# Altium PCB PCB-15_19.PcbDoc (part 2 of 4)
Units mm, origin at the board's own origin, x right, y up, seen from the top; angles counter-clockwise.
Board outline 190 x 150 mm, 6 copper layers (Top Layer, Mid-Layer 1, VCC3V3, GND, Mid-Layer 2, Bottom Layer), stack 1.173 mm thick; 129 components, 396 nets, 1206 pads, 565 vias.
Unrouted connection lines stored in the file: 15.
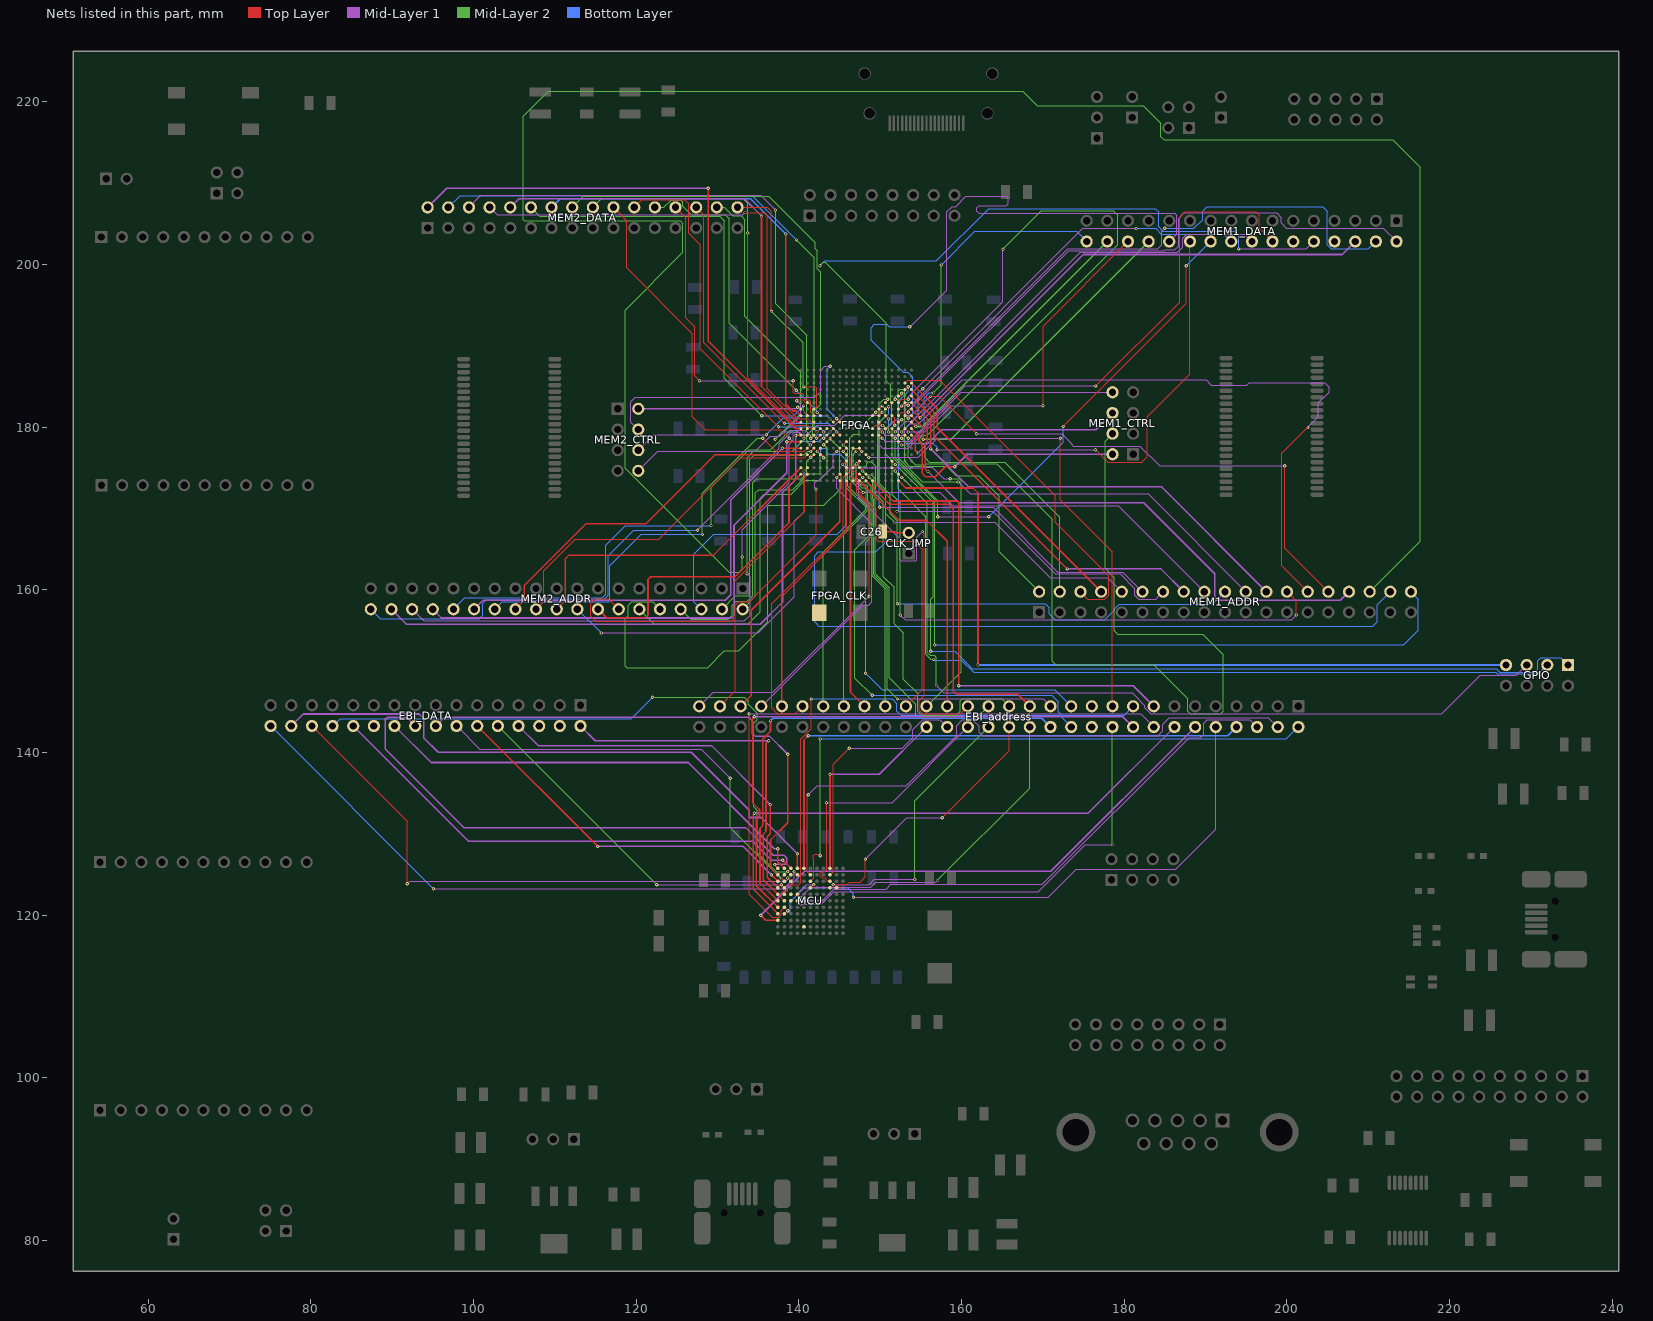
[diagram p6: the nets of this part, all layers, seen from the top]

## Via types
v1: diameter 0.4, hole 0.2, Top Layer to Bottom Layer, 548 vias
v2: diameter 0.4, hole 0.25, Top Layer to Bottom Layer, tented top, 9 vias
v3: diameter 7, hole 5, Top Layer to Bottom Layer, 4 vias
v4: diameter 1.3, hole 0.9, Top Layer to Bottom Layer, 3 vias
v5: diameter 1.5, hole 1.1, Top Layer to Bottom Layer, 1 vias

## Nets (pads, with @x,y where several pads share a name; then routed paths per layer and width w, separated by ;. In a path a pad name is that pad's centre, name@x,y a point inside that pad or via, vN(x,y) a via of type N, cw(c..) or ccw(c..) an arc to the next point about the centre after c; other vN are vias at no path point) (continued)
A11: EBI_address.38 MCU.A9 | length 25.8
  Top Layer w0.2: MCU.A9@143.829,125.754 v1(143.829,137.312)
  Mid-Layer 1 w0.2: v1(143.829,137.312) 149.885,137.312 EBI_address.38@155.702,143.129
A12: EBI_address.36 MCU.B9 | length 31
  Top Layer w0.1: MCU.B9@143.829,124.954 144.221,125.346 144.221,138.532 v1(146.202,140.513)
  Mid-Layer 1 w0.1: v1(146.202,140.513) 152.732,140.513 154.001,141.782 154.001,142.8 155.245,144.043 157.328,144.043 EBI_address.36@158.242,143.129
A13: EBI_address.34 MCU.C9 | length 32.2
  Top Layer w0.1: v1(143.408,133.807) 143.408,125.603 143.154,125.349 142.85,125.349 142.646,125.146 142.646,124.765 142.85,124.562 143.173,124.562 143.581,124.154 MCU.C9@143.829,124.154
  Mid-Layer 1 w0.1: v1(143.408,133.807) 151.46,133.807 EBI_address.34@160.782,143.129
A14: EBI_address.32 MCU.D9 | length 33.4
  Top Layer w0.1: MCU.D9@143.829,123.354 v1(144.224,123.749)
  Mid-Layer 1 w0.1: v1(144.224,123.749) 148.641,123.749 149.276,124.384 v1(154.254,124.384)
  Mid-Layer 2 w0.1: v1(154.254,124.384) 154.254,134.061 EBI_address.32@163.322,143.129
A15: EBI_address.30 MCU.D10 | length 32.5
  Top Layer w0.1: MCU.D10@144.629,123.354 144.948,123.673 144.948,123.774 145.974,123.774 146.253,124.054 147.523,124.054 148.184,124.714 v1(148.184,126.873) ; v1(157.632,131.978) 165.862,140.208 EBI_address.30@165.862,143.129
  Mid-Layer 1 w0.1: v1(148.184,126.873) 153.289,131.978 v1(157.632,131.978)
A16: EBI_address.28 MCU.E4 | length 41.8
  Top Layer w0.1: MCU.E4@139.829,122.554 v1(140.233,122.149)
  Mid-Layer 1 w0.1: v1(140.233,122.149) 141.484,123.399 148.824,123.399 149.454,124.028 156.82,124.028 v1(157.048,124.257)
  Mid-Layer 2 w0.1: v1(157.048,124.257) 168.402,135.611 EBI_address.28@168.402,143.129
A17: EBI_address.26 MCU.F1 | length 58.6
  Top Layer w0.2: v1(136.525,143.878) 136.525,142.588 135.565,141.629 135.565,131.024 135.23,130.688 135.23,123.953 MCU.F1@137.429,121.754
  Bottom Layer w0.2: v1(136.525,143.878) 136.843,144.196 169.875,144.196 EBI_address.26@170.942,143.129
A18: EBI_address.24 MCU.F2 | length 61.4
  Top Layer w0.1: MCU.F2@138.229,121.754 137.846,122.137 137.846,122.733 138.074,122.961 138.575,122.961 138.608,122.994 138.608,123.546 138.811,123.749 140.005,123.749 140.208,123.952 140.208,141.602 141.529,142.923 v1(141.529,146.583)
  Bottom Layer w0.1: v1(141.529,146.583) 151.486,146.583 152.07,145.999 152.07,145.085 152.603,144.551 172.06,144.551 EBI_address.24@173.482,143.129
A19: EBI_address.22 MCU.F3
A20: EBI_address.20 MCU.F4 | length 56.4
  Top Layer w0.1: MCU.F4@139.829,121.754 v1(140.222,121.361)
  Mid-Layer 1 w0.1: v1(140.222,121.361) 142.748,121.361 144.272,122.885 169.443,122.885 175.235,128.676 v1(178.562,128.676)
  Mid-Layer 2 w0.1: v1(178.562,128.676) EBI_address.20@178.562,143.129
A21: EBI_address.18 MCU.G1 | length 72.2
  Top Layer w0.2: v1(134.518,144.399) 134.315,144.196 134.315,133.845 135.165,132.994 135.165,132.222 134.779,131.835 134.779,123.604 MCU.G1@137.429,120.954
  Mid-Layer 1 w0.2: v1(134.518,144.399) 179.832,144.399 EBI_address.18@181.102,143.129
A22: EBI_address.16 MCU.G2 | length 78.9
  Top Layer w0.1: v1(133.883,144.755) 133.883,122.58 136.703,119.761 137.566,119.761 137.82,120.015 137.82,120.545 MCU.G2@138.229,120.954
  Mid-Layer 1 w0.1: v1(133.883,144.755) 182.016,144.755 EBI_address.16@183.642,143.129
A23: EBI_address.14 MCU.H1 | length 69.7
  Top Layer w0.2: v1(134.547,132.509) 134.379,132.34 134.379,123.204 MCU.H1@137.429,120.154
  Mid-Layer 1 w0.2: v1(134.547,132.509) 175.562,132.509 EBI_address.14@186.182,143.129
A24: EBI_address.12 MCU.J1 | length 65.4
  Top Layer w0.2: v1(135.312,119.993) 135.951,119.354 MCU.J1@137.429,119.354
  Mid-Layer 1 w0.2: v1(135.312,119.993) 140.693,125.374 170.967,125.374 EBI_address.12@188.722,143.129
A25: EBI_address.10 MCU.H2 | length 72.2
  Top Layer w0.1: MCU.H2@138.229,120.154 138.229,120.32 138.405,120.32 v1(138.633,120.548)
  Mid-Layer 1 w0.1: v1(146.71,122.199) 170.663,122.199 174.117,125.654 186.36,125.654 191.262,130.556 EBI_address.10@191.262,143.129
  Bottom Layer w0.1: v1(138.633,120.548) 138.633,120.396 138.938,120.396 138.938,121.641 140.64,123.342 145.999,123.342 146.71,122.631 v1(146.71,122.199)
BACKUP.GPIO0: FPGA.R15 GPIO.1 | length 106.7
  Top Layer w0.1: FPGA.R15@151.447,175.807 v1(151.842,175.412)
  Mid-Layer 2 w0.1: v1(151.842,175.412) 156.513,170.741 156.513,159.155 156.21,158.852 v1(156.21,152.425)
  Bottom Layer w0.1: v1(156.21,152.425) 159.182,152.425 161.341,150.266 225.744,150.266 226.162,149.849 230.429,149.849 230.835,150.255 230.835,151.257 231.242,151.663 233.655,151.663 GPIO.1@234.569,150.749
BACKUP.GPIO1: FPGA.T15 GPIO.3 | length 102.5
  Top Layer w0.1: FPGA.T15@151.447,175.007 151.841,174.613 v1(151.841,174.6)
  Mid-Layer 2 w0.1: v1(151.841,174.6) 152.222,174.219 152.222,172.39 155.613,168.999 155.613,152.066 156.244,151.435 v1(156.566,151.435)
  Bottom Layer w0.1: v1(156.566,151.435) 156.642,151.359 159.961,151.359 161.485,149.835 225.663,149.835 225.849,149.649 230.929,149.649 GPIO.3@232.029,150.749
BACKUP.GPIO2: FPGA.U16 GPIO.5 | length 104.9
  Top Layer w0.1: FPGA.U16@152.247,174.207 152.642,173.812 v1(152.654,173.812)
  Mid-Layer 1 w0.1: v1(156.921,148.234) 157.836,147.32 180.975,147.32 182.526,145.769 182.526,145.491 183.262,144.755 219.075,144.755 223.799,149.479 228.219,149.479 GPIO.5@229.489,150.749
  Mid-Layer 2 w0.1: v1(152.654,173.812) 155.813,170.653 155.813,152.275 156.165,151.923 156.667,151.923 156.921,151.669 v1(156.921,148.234)
BACKUP.GPIO3: FPGA.V16 GPIO.7 | length 96.5
  Top Layer w0.2: FPGA.V16@152.247,173.407 153.137,172.517 161.411,172.517 162.027,171.901 v1(162.027,150.749)
  Bottom Layer w0.2: v1(162.027,150.749) GPIO.7@226.949,150.749
CLK: C26.2 CLK_JMP.2 | length 3.3
  Top Layer w0.2: C26.2@150.321,167.148 151.841,167.148 151.99,166.999 CLK_JMP.2@153.524,166.999
CS0: EBI_address.6 MCU.D6 | length 70.7
  Top Layer w0.1: MCU.D6@141.429,123.354 141.824,123.749 v1(141.834,123.749)
  Mid-Layer 1 w0.1: v1(141.834,123.749) 140.917,123.749 139.878,122.709 139.878,121.895 140.005,121.768 142.872,121.768 144.303,123.199 150.732,123.199 151.308,123.774 169.926,123.774 187.985,141.834 189.357,141.834 189.763,142.24 189.763,143.612 190.195,144.043 195.428,144.043 EBI_address.6@196.342,143.129
CS1: EBI_address.8 MCU.A5 | length 69.6
  Top Layer w0.2: MCU.A5@140.629,125.754 140.629,141.518 v1(141.173,142.062)
  Bottom Layer w0.2: v1(141.173,142.062) 192.735,142.062 EBI_address.8@193.802,143.129
DATA0: EBI_DATA.32 MCU.B4 | length 74.6
  Top Layer w0.1: v1(139.421,125.349) 139.434,125.349 MCU.B4@139.829,124.954
  Mid-Layer 1 w0.1: v1(95.072,123.241) 138.125,123.241 139.421,124.536 v1(139.421,125.349)
  Bottom Layer w0.1: EBI_DATA.32@75.057,143.256 v1(95.072,123.241)
DATA0.ADDR0: FPGA.F15 MEM1_ADDR.2 | length 38.5
  Top Layer w0.1: FPGA.F15@151.447,183.007 151.841,183.401 v1(151.841,183.413)
  Mid-Layer 2 w0.1: v1(151.841,183.413) 151.841,183.705 152.197,184.06 152.197,184.443 152.391,184.637 152.777,184.637 153.01,184.404 153.01,175.789 153.606,175.193 158.182,175.193 159.36,174.015 162.128,174.015 164.617,171.526 164.617,164.694 MEM1_ADDR.2@169.545,159.766
DATA0.ADDR1: FPGA.F16 MEM1_ADDR.4 | length 110.2
  Top Layer w0.1: FPGA.F16@152.247,183.007 152.653,183.413 v1(153.441,183.413)
  Mid-Layer 1 w0.1: v1(153.441,183.413) 153.441,183.72 165.1,195.379 v1(165.1,201.879)
  Mid-Layer 2 w0.1: v1(165.1,201.879) 169.824,206.604 178.638,206.604 179.197,206.045 179.197,202.387 155.78,178.97 155.245,178.97 154.838,178.564 154.838,178.308 155.524,177.622 155.524,176.2 156.058,175.666 165.329,175.666 172.085,168.91 MEM1_ADDR.4@172.085,159.766
DATA0.ADDR2: FPGA.C17 MEM1_ADDR.6 | length 43.5
  Top Layer w0.1: FPGA.C17@153.047,185.407 153.39,185.75 157.353,185.75 171.552,171.552 171.552,168.275 178.079,161.747 178.079,159.309 177.622,158.852 175.539,158.852 MEM1_ADDR.6@174.625,159.766
DATA0.ADDR3: FPGA.C18 MEM1_ADDR.8 | length 35.3
  Top Layer w0.2: FPGA.C18@153.847,185.407 157.008,182.246 157.008,179.923 MEM1_ADDR.8@177.165,159.766
DATA0.ADDR4: FPGA.F14 MEM1_ADDR.10 | length 48.8
  Top Layer w0.1: FPGA.F14@150.647,183.007 150.926,183.286 v1(150.926,183.413)
  Mid-Layer 1 w0.1: v1(151.765,168.275) 164.109,168.275 170.917,161.468 178.003,161.468 MEM1_ADDR.10@179.705,159.766
  Mid-Layer 2 w0.1: v1(150.926,183.413) 150.419,183.413 149.885,182.88 149.885,181.008 149.691,180.814 149.691,172.969 150.672,171.988 150.672,169.368 v1(151.765,168.275)
DATA0.ADDR5: FPGA.G14 MEM1_ADDR.12 | length 50
  Top Layer w0.1: FPGA.G14@150.647,182.207 150.939,182.499 v1(151.028,182.499)
  Mid-Layer 1 w0.1: v1(149.962,170.129) 163.881,170.129 171.831,162.179 179.832,162.179 MEM1_ADDR.12@182.245,159.766
  Bottom Layer w0.1: v1(149.962,170.129) 149.885,170.205 149.885,180.518 151.028,181.661 v1(151.028,182.499)
DATA0.ADDR6: FPGA.D17 MEM1_ADDR.14 | length 54.5
  Top Layer w0.1: FPGA.D17@153.047,184.607 153.403,184.963 v1(153.441,184.963)
  Mid-Layer 1 w0.1: v1(152.07,169.621) 163.83,169.621 171.501,161.95 179.502,161.95 181.331,160.122 181.331,159.309 181.788,158.852 183.871,158.852 MEM1_ADDR.14@184.785,159.766
  Bottom Layer w0.1: v1(152.07,169.621) 152.298,169.85 152.298,183.261 153.441,184.404 v1(153.441,184.963)
DATA0.ADDR7: FPGA.D18 MEM1_ADDR.16 | length 45.5
  Top Layer w0.2: FPGA.D18@153.847,184.607 156.608,181.846 156.608,178.951 v1(172.999,162.56)
  Mid-Layer 1 w0.2: v1(172.999,162.56) 184.531,162.56 MEM1_ADDR.16@187.325,159.766
DATA0.ADDR8: FPGA.H12 MEM1_ADDR.18 | length 59.7
  Top Layer w0.1: FPGA.H12@149.047,181.407 v1(149.454,181.813)
  Mid-Layer 1 w0.1: v1(147.93,171.958) 157.311,171.958 158.937,170.332 179.299,170.332 MEM1_ADDR.18@189.865,159.766
  Mid-Layer 2 w0.1: v1(147.93,171.958) 146.291,173.597 146.291,178.65 146.737,179.097 147.32,179.097 147.437,179.214 147.437,179.797 v1(149.454,181.813)
DATA0.ADDR9: FPGA.G13 MEM1_ADDR.20 | length 69.3
  Top Layer w0.1: FPGA.G13@149.847,182.207 v1(150.241,182.601)
  Mid-Layer 2 w0.1: v1(150.241,182.601) 150.597,182.245 150.597,181.325 149.891,180.619 149.891,173.076 151.257,171.71 151.257,169.367 152.121,168.504 v1(152.121,158.267)
  Bottom Layer w0.1: v1(152.121,158.267) 170.282,158.267 170.79,157.759 170.79,157.023 171.501,156.312 177.597,156.312 178.841,157.556 178.841,157.683 179.375,158.217 190.856,158.217 MEM1_ADDR.20@192.405,159.766
DATA0.ADDR10: FPGA.E16 MEM1_ADDR.22 | length 58.3
  Top Layer w0.1: FPGA.E16@152.247,183.807 152.502,183.807 152.654,183.959 v1(152.654,184.15)
  Mid-Layer 1 w0.1: v1(159.614,173.253) 161.092,171.775 182.936,171.775 MEM1_ADDR.22@194.945,159.766
  Mid-Layer 2 w0.1: v1(152.654,184.15) 152.248,183.744 152.248,176.204 155.199,173.253 v1(159.614,173.253)
DATA0.ADDR11: FPGA.E18 MEM1_ADDR.24 | length 56
  Top Layer w0.2: FPGA.E18@153.847,183.807 156.208,181.446 v1(156.208,177.319)
  Mid-Layer 1 w0.2: v1(156.208,177.319) 160.884,172.644 184.607,172.644 MEM1_ADDR.24@197.485,159.766
DATA0.ADDR12: FPGA.K12 MEM1_ADDR.26 | length 78.1
  Top Layer w0.1: FPGA.K12@149.047,179.807 149.437,180.197 v1(150.308,180.197) ; MEM1_ADDR.26@200.025,159.766 201.168,158.623 v1(201.168,156.896)
  Mid-Layer 1 w0.1: v1(152.476,156.896) 153.06,156.312 200.584,156.312 v1(201.168,156.896)
  Mid-Layer 2 w0.1: v1(150.308,180.197) 150.697,179.808 150.697,176.658 151.486,175.87 151.486,171.679 152.476,170.688 v1(152.476,156.896)
DATA0.ADDR13: FPGA.K13 MEM1_ADDR.28 | length 88.3
  Top Layer w0.1: FPGA.K13@149.847,179.807 v1(150.254,179.4) ; MEM1_ADDR.28@202.565,159.766 199.39,162.941 199.39,176.759 v1(202.59,179.959)
  Mid-Layer 1 w0.1: v1(150.254,179.4) 150.635,179.019 152.832,179.019 153.035,179.222 153.035,179.746 153.728,180.44 154.735,180.44 160.122,185.826 190.068,185.826 190.729,185.166 195.097,185.166 195.402,185.471 204.648,185.471 205.207,184.912 205.207,184.302 203.886,182.982 203.886,181.254 v1(202.59,179.959)
DATA0.ADDR14: FPGA.F17 MEM1_ADDR.30 | length 71.1
  Top Layer w0.1: FPGA.F17@153.047,183.007 153.047,182.804 153.34,182.804 v1(153.467,182.677) ; v1(156.185,183.769) 157.251,183.769 v1(161.849,179.172) ; v1(199.746,175.235) 199.746,165.125 MEM1_ADDR.30@205.105,159.766
  Mid-Layer 1 w0.1: v1(153.467,182.677) 153.06,182.677 153.06,181.661 153.264,181.458 153.873,181.458 v1(156.185,183.769) ; v1(161.849,179.172) 172.314,179.172 173.533,177.952 173.533,177.876 173.736,177.673 181.915,177.673 184.353,175.235 v1(199.746,175.235)
DATA0.ADDR15: FPGA.F18 MEM1_ADDR.32 | length 70
  Top Layer w0.2: FPGA.F18@153.847,183.007 155.808,181.046 155.808,178.275 155.561,178.027 155.561,174.852 v1(155.878,174.534)
  Mid-Layer 1 w0.2: v1(155.878,174.534) 159.699,170.713 182.397,170.713 191.135,161.976 191.135,159.017 191.452,158.699 206.578,158.699 MEM1_ADDR.32@207.645,159.766
DATA0.ADDR16: FPGA.H13 MEM1_ADDR.34 | length 288.6
  Top Layer w0.1: FPGA.H13@149.847,181.407 149.847,181.419 v1(150.241,181.813)
  Mid-Layer 1 w0.1: v1(133.045,164.033) 133.045,167.359 138.836,173.15 138.836,177.902 139.291,178.356 139.291,179.253 139.395,179.357 140.132,179.357 140.444,179.045 141.021,179.045 142.189,180.213 144.424,180.213 145.669,181.458 149.885,181.458 v1(150.241,181.813)
  Mid-Layer 2 w0.1: v1(133.045,164.033) 133.045,162.587 132.611,162.154 131.443,162.154 118.643,174.953 118.643,194.355 125.755,201.467 125.755,205.029 125.4,205.384 106.248,205.384 106.147,205.486 106.147,218.237 109.22,221.31 167.538,221.31 169.316,219.532 182.321,219.532 184.506,217.348 184.506,215.722 184.912,215.316 213.03,215.316 216.383,211.963 216.383,165.964 MEM1_ADDR.34@210.185,159.766
DATA0.ADDR17: FPGA.H14 MEM1_ADDR.36 | length 107.4
  Top Layer w0.1: FPGA.H14@150.647,181.407 v1(151.054,181)
  Bottom Layer w0.1: v1(151.054,181) 151.054,180.188 150.673,179.807 150.673,165.837 149.479,164.643 142.392,164.643 141.935,164.186 141.935,156.058 142.469,155.524 210.566,155.524 211.099,156.058 211.099,158.14 MEM1_ADDR.36@212.725,159.766
DATA0.ADDR18: FPGA.H15 MEM1_ADDR.38 | length 96
  Top Layer w0.1: FPGA.H15@151.447,181.407 151.79,181.064 v1(151.79,180.213)
  Mid-Layer 2 w0.1: v1(151.79,180.213) 151.486,179.908 151.486,176.276 156.713,171.049 v1(156.713,153.213)
  Bottom Layer w0.1: v1(156.713,153.213) 214.351,153.213 216.179,155.042 216.179,158.852 MEM1_ADDR.38@215.265,159.766
DATA0.BUS0: FPGA.H16 MEM1_DATA.2 | length 75.5
  Top Layer w0.1: FPGA.H16@152.247,181.407 152.653,181.813 v1(153.467,181.813)
  Mid-Layer 1 w0.1: v1(153.467,181.813) 153.467,182.011 173.158,201.701 184.913,201.701 185.029,201.817 186.247,201.817 186.683,202.254 186.683,205.657 187.35,206.324 198.73,206.324 199.288,205.765 199.288,205.105 199.949,204.445 211.861,204.445 MEM1_DATA.2@213.487,202.819
DATA0.BUS1: FPGA.G16 MEM1_DATA.4 | length 75.6
  Top Layer w0.1: FPGA.G16@152.247,182.207 152.641,182.601 v1(152.654,182.601)
  Mid-Layer 1 w0.1: v1(152.654,182.601) 153.111,183.058 154.189,183.058 173.036,201.905 184.15,201.905 184.633,202.387 184.633,204.089 v1(184.988,204.445)
  Bottom Layer w0.1: v1(184.988,204.445) 188.57,204.445 189.636,205.511 189.636,206.527 190.195,207.086 204.419,207.086 204.953,206.553 204.953,202.387 205.435,201.905 210.033,201.905 MEM1_DATA.4@210.947,202.819
DATA0.BUS2: FPGA.G18 MEM1_DATA.6 | length 64
  Top Layer w0.2: FPGA.G18@153.847,182.207 v1(154.908,181.146)
  Mid-Layer 1 w0.2: v1(154.908,181.146) 174.981,201.219 206.807,201.219 MEM1_DATA.6@208.407,202.819
DATA0.BUS3: FPGA.J13 MEM1_DATA.8 | length 0.6
  Top Layer w0.1: FPGA.J13@149.847,180.607 v1(150.247,180.207)
DATA0.BUS4: FPGA.K14 MEM1_DATA.10 | length 93.9
  Top Layer w0.1: FPGA.K14@150.647,179.807 v1(151.054,179.4)
  Mid-Layer 1 w0.1: v1(194.081,201.905) 202.413,201.905 MEM1_DATA.10@203.327,202.819
  Mid-Layer 2 w0.1: v1(142.596,199.847) 143.002,200.254 143.269,200.254 150.774,192.748 150.774,185.649 151.282,185.141 151.282,182.855 151.409,182.728 151.409,180.543 151.054,180.188 v1(151.054,179.4)
  Bottom Layer w0.1: v1(142.596,199.847) 143.18,200.431 156.895,200.431 163.321,206.858 183.82,206.858 184.226,206.451 184.226,204.622 184.754,204.095 193.593,204.095 194.081,203.606 v1(194.081,201.905)
DATA0.BUS5: FPGA.L12 MEM1_DATA.12
DATA0.BUS6: FPGA.L13 MEM1_DATA.14 | length 68.9
  Top Layer w0.1: FPGA.L13@149.847,179.007 v1(150.241,178.613) ; v1(176.505,185.064) 186.817,195.377 186.817,205.74 187.536,206.459 196.207,206.459 196.621,206.045 196.621,204.445 MEM1_DATA.14@198.247,202.819
  Mid-Layer 1 w0.1: v1(150.241,178.613) 150.622,178.232 153.619,178.232 160.452,185.064 v1(176.505,185.064)
DATA0.BUS7: FPGA.K15 MEM1_DATA.16 | length 55.5
  Top Layer w0.1: FPGA.K15@151.447,179.807 v1(151.854,179.4)
  Mid-Layer 1 w0.1: v1(151.854,179.4) 153.16,180.706 153.855,180.706 174.621,201.473 186.512,201.473 187.173,202.133 187.173,203.2 187.706,203.733 194.793,203.733 MEM1_DATA.16@195.707,202.819
DATA0.BUS8: FPGA.K16 MEM1_DATA.18 | length 53.7
  Top Layer w0.1: FPGA.K16@152.247,179.807 v1(152.654,179.4)
  Mid-Layer 1 w0.1: v1(155.222,184.709) 174.933,204.419 v1(181.483,204.419)
  Bottom Layer w0.1: v1(152.654,179.4) 154.711,181.458 154.711,184.198 v1(155.222,184.709) ; v1(181.483,204.419) 183.896,204.419 184.582,203.733 192.253,203.733 MEM1_DATA.18@193.167,202.819
DATA0.BUS9: FPGA.L15 MEM1_DATA.20 | length 63.8
  Top Layer w0.1: FPGA.L15@151.447,179.007 v1(151.841,178.613) ; v1(172.517,180.086) 187.63,195.199 v1(187.63,199.822)
  Mid-Layer 1 w0.1: v1(157.074,168.986) v1(163.347,168.986)
  Mid-Layer 2 w0.1: v1(151.841,178.613) 151.841,176.203 157.074,170.971 v1(157.074,168.986)
  Bottom Layer w0.1: v1(163.347,168.986) 172.517,178.156 v1(172.517,180.086) ; v1(187.63,199.822) MEM1_DATA.20@190.627,202.819
DATA0.BUS10: FPGA.L16 MEM1_DATA.22 | length 61.1
  Top Layer w0.1: FPGA.L16@152.247,179.007 152.451,179.007 v1(152.654,178.613) ; v1(176.479,177.216) 178.003,175.692 182.169,175.692 182.855,176.378 182.855,181.254 188.087,186.487 MEM1_DATA.22@188.087,202.819
  Mid-Layer 1 w0.1: v1(156.997,177.216) v1(176.479,177.216)
  Bottom Layer w0.1: v1(152.654,178.613) 153.238,178.029 156.464,178.029 156.997,177.495 v1(156.997,177.216)
DATA0.BUS11: FPGA.H17 MEM1_DATA.24 | length 77.4
  Top Layer w0.1: FPGA.H17@153.047,181.407 153.111,181.407 v1(153.441,181.077)
  Mid-Layer 1 w0.1: v1(153.645,192.329) 153.722,192.329 158.217,196.823 158.217,206.451 158.852,207.086 159.283,207.086 160.553,208.356 165.481,208.356 165.76,208.077 165.76,207.467 165.532,207.239 162.154,207.239 161.9,206.985 161.9,206.527 162.154,206.273 186.233,206.273 186.461,206.045 186.461,203.733 MEM1_DATA.24@185.547,202.819
  Bottom Layer w0.1: v1(153.441,181.077) 154,181.635 154,186.131 153.416,186.715 152.832,186.715 148.895,190.652 148.895,192.227 149.301,192.634 150.822,192.634 151.127,192.329 v1(153.645,192.329)
DATA0.BUS12: FPGA.H18 MEM1_DATA.26 | length 41.3
  Top Layer w0.2: FPGA.H18@153.847,181.407 155.308,179.946 v1(155.308,178.486)
  Mid-Layer 2 w0.2: v1(155.308,178.486) 158.674,178.486 MEM1_DATA.26@183.007,202.819
DATA0.BUS13: FPGA.J16 MEM1_DATA.28 | length 52.9
  Top Layer w0.1: FPGA.J16@152.247,180.607 152.539,180.899 v1(152.654,180.899) ; v1(170.028,182.626) 170.028,192.38 MEM1_DATA.28@180.467,202.819
  Mid-Layer 1 w0.1: v1(152.654,180.899) 151.892,180.899 150.8,179.807 149.962,179.807 149.682,179.527 149.682,178.003 150.317,177.368 153.472,177.368 158.73,182.626 v1(170.028,182.626)
DATA0.BUS14: FPGA.J18 MEM1_DATA.30 | length 33.7
  Top Layer w0.2: FPGA.J18@153.847,180.607 v1(154.381,180.073)
  Mid-Layer 2 w0.2: v1(154.381,180.073) 155.181,180.073 MEM1_DATA.30@177.927,202.819
DATA0.BUS15: FPGA.K17 MEM1_DATA.32 | length 44
  Top Layer w0.1: FPGA.K17@153.047,179.807 v1(153.454,179.4)
  Mid-Layer 2 w0.1: v1(156.505,184.191) 157.505,185.191 v1(157.505,199.923)
  Bottom Layer w0.1: v1(153.454,179.4) 154.838,179.4 155.397,179.959 155.397,183.53 156.058,184.191 v1(156.505,184.191) ; v1(157.505,199.923) 161.646,204.064 174.142,204.064 MEM1_DATA.32@175.387,202.819
DATA0.ENABLE: FPGA.M16 MEM1_CTRL.8 | length 29.2
  Top Layer w0.1: FPGA.M16@152.247,178.207 v1(152.654,177.8)
  Mid-Layer 1 w0.1: v1(152.654,177.8) 153.517,177.8 159.994,184.277 MEM1_CTRL.8@178.562,184.277
DATA0.LB: FPGA.L17 MEM1_CTRL.4 | length 112.6
  Top Layer w0.1: FPGA.L17@153.047,179.007 v1(153.441,178.613)
  Mid-Layer 2 w0.1: v1(153.441,178.613) 153.441,176.262 154.311,175.393 155.575,175.393 155.646,175.463 164.363,175.463 171.171,168.656 171.171,151.181 171.577,150.774 183.617,150.774 187.808,146.583 187.808,145.085 188.138,144.755 191.846,144.755 192.176,145.085 192.176,151.994 189.662,154.508 179.222,154.508 178.791,154.94 178.791,161.493 177.648,162.636 177.648,178.283 MEM1_CTRL.4@178.562,179.197
DATA0.UB: FPGA.K18 MEM1_CTRL.2 | length 30.8
  Top Layer w0.2: FPGA.K18@153.847,179.807 154.737,178.917 154.737,178.249 155.161,177.825 155.161,174.303 155.575,173.888 156.769,173.888 157.988,175.108 v1(159.156,175.108)
  Mid-Layer 1 w0.2: v1(159.156,175.108) 160.706,176.657 MEM1_CTRL.2@178.562,176.657
DATA0.WRITE: FPGA.L18 MEM1_CTRL.6 | length 28.5
  Top Layer w0.2: FPGA.L18@153.847,179.007 154.33,178.524 154.33,177.14 v1(154.661,176.809)
  Mid-Layer 1 w0.2: v1(154.661,176.809) 157.531,179.68 176.505,179.68 MEM1_CTRL.6@178.562,181.737
DATA1: EBI_DATA.30 MCU.A4 | length 73.7
  Top Layer w0.2: MCU.A4@139.829,125.754 v1(139.829,127.533)
  Mid-Layer 1 w0.2: EBI_DATA.30@77.597,143.256 79.07,144.729 93.345,144.729 93.904,144.17 93.904,141.757 95.656,140.005 126.771,140.005 133.891,132.885 133.891,132.029 133.922,131.999 135.363,131.999 v1(139.829,127.533)
DATA1.ADDR0: FPGA.N4 MEM2_ADDR.2 | length 27.3
  Top Layer w0.1: v1(142.246,177.006) FPGA.N4@142.647,177.407
  Mid-Layer 2 w0.1: MEM2_ADDR.2@133.096,157.607 134.671,159.182 134.671,171.907 135.077,172.314 139.248,172.314 141.179,174.244 142.511,174.244 142.613,174.346 142.613,176.64 v1(142.246,177.006)
DATA1.ADDR1: FPGA.N3 MEM2_ADDR.4 | length 29.3
  Top Layer w0.1: v1(141.453,177.013) FPGA.N3@141.847,177.407
  Mid-Layer 2 w0.1: MEM2_ADDR.4@130.556,157.607 132.196,159.247 133.996,159.247 133.996,176.058 134.518,176.581 140.652,176.581 141.084,177.013 v1(141.453,177.013)
DATA1.ADDR2: FPGA.P4 MEM2_ADDR.6 | length 41.1
  Top Layer w0.1: FPGA.P4@142.647,176.607 142.85,176.607 143.053,176.404 v1(143.053,176.225)
  Bottom Layer w0.1: MEM2_ADDR.6@128.016,157.607 127.102,158.521 127.102,164.337 129.567,166.802 144.704,166.802 145.771,167.869 145.771,175.971 145.11,176.632 143.717,176.632 143.45,176.898 143.45,177.19 143.221,177.419 142.926,177.419 142.697,177.19 142.697,176.581 v1(143.053,176.225)
DATA1.ADDR3: FPGA.P3 MEM2_ADDR.8 | length 34.9
  Top Layer w0.1: v1(141.478,176.301) 141.541,176.301 FPGA.P3@141.847,176.607
  Mid-Layer 2 w0.1: MEM2_ADDR.8@125.476,157.607 126.695,156.388 131.343,156.388 131.826,156.87 131.826,158.09 132.334,158.598 133.655,158.598 134.315,159.258 134.315,173.126 134.823,173.634 140.267,173.634 140.995,174.362 140.995,175.819 v1(141.478,176.301)
DATA1.ADDR4: FPGA.L6 MEM2_ADDR.10 | length 63.4
  Top Layer w0.1: v1(143.821,178.581) FPGA.L6@144.247,179.007
  Mid-Layer 2 w0.1: MEM2_ADDR.10@122.936,157.607 122.022,158.521 119.482,158.521 119.05,158.09 119.05,156.82 118.669,156.439 118.669,150.622 118.872,150.419 128.778,150.419 130.861,152.502 132.639,152.502 136.195,156.058 136.195,170.282 136.296,170.383 143.078,170.383 145.203,172.508 145.203,174.168 145.009,174.362 145.009,177.394 v1(143.821,178.581)
DATA1.ADDR5: FPGA.M5 MEM2_ADDR.12 | length 43.9
  Top Layer w0.1: v1(143.053,177.825) 143.065,177.825 FPGA.M5@143.447,178.207
  Mid-Layer 2 w0.1: MEM2_ADDR.12@120.396,157.607 122.174,155.829 133.782,155.829 135.255,157.302 135.255,171.272 135.738,171.755 139.04,171.755 140.741,173.457 142.494,173.457 143.51,174.473 143.51,177.368 v1(143.053,177.825)
DATA1.ADDR6: FPGA.U2 MEM2_ADDR.14 | length 45.2
  Top Layer w0.1: MEM2_ADDR.14@117.856,157.607 116.586,158.877 115.011,158.877 114.402,158.267 114.402,156.743 115.011,156.134 131.674,156.134 131.996,156.456 131.996,160.952 140.716,169.672 140.716,173.876 FPGA.U2@141.047,174.207
DATA1.ADDR7: FPGA.U1 MEM2_ADDR.16 | length 37.9
  Top Layer w0.2: MEM2_ADDR.16@115.316,157.607 116.383,156.54 121.158,156.54 121.463,156.845 121.463,161.29 121.78,161.607 132.143,161.607 138.786,168.25 138.786,172.746 FPGA.U1@140.247,174.207
DATA1.ADDR8: FPGA.T2 MEM2_ADDR.18 | length 46.3
  Top Layer w0.1: v1(140.64,174.6) FPGA.T2@141.047,175.007
  Mid-Layer 1 w0.1: v1(115.697,154.686) 134.997,154.686 139.446,159.135 139.446,168.411 140.64,169.605 v1(140.64,174.6)
  Bottom Layer w0.1: MEM2_ADDR.18@112.776,157.607 v1(115.697,154.686)
DATA1.ADDR9: FPGA.T1 MEM2_ADDR.20 | length 40.2
  Top Layer w0.2: MEM2_ADDR.20@110.236,157.607 111.303,158.674 111.303,163.83 111.735,164.262 129.502,164.262 FPGA.T1@140.247,175.007
DATA1.ADDR10: FPGA.P2 MEM2_ADDR.22 | length 43.4
  Top Layer w0.1: MEM2_ADDR.22@107.696,157.607 108.636,158.547 108.636,162.331 112.497,166.192 122.784,166.192 132.791,176.2 140.64,176.2 FPGA.P2@141.047,176.607
DATA1.ADDR11: FPGA.P1 MEM2_ADDR.24 | length 44
  Top Layer w0.2: MEM2_ADDR.24@105.156,157.607 106.223,158.674 106.223,160.503 113.843,168.123 121.209,168.123 129.693,176.607 FPGA.P1@140.247,176.607
DATA1.ADDR12: FPGA.N2 MEM2_ADDR.26 | length 53.4
  Top Layer w0.1: v1(135.56,178.613) 137.135,177.038 140.678,177.038 FPGA.N2@141.047,177.407
  Mid-Layer 2 w0.1: v1(128.143,166.802) 128.143,171.882 134.874,178.613 v1(135.56,178.613)
  Bottom Layer w0.1: MEM2_ADDR.26@102.616,157.607 103.516,158.507 116.617,158.507 116.777,158.667 116.777,162.954 120.625,166.802 v1(128.143,166.802)
DATA1.ADDR13: FPGA.N1 MEM2_ADDR.28 | length 55.2
  Top Layer w0.2: v1(137.986,177.407) FPGA.N1@140.247,177.407
  Mid-Layer 1 w0.2: MEM2_ADDR.28@100.076,157.607 101.166,158.697 130.947,158.697 131.623,159.372 131.623,171.044 v1(137.986,177.407)
DATA1.ADDR14: FPGA.M3 MEM2_ADDR.30 | length 61
  Top Layer w0.1: v1(141.402,177.8) 141.44,177.8 FPGA.M3@141.847,178.207
  Mid-Layer 2 w0.1: v1(129.21,167.894) 129.21,172.618 133.833,177.241 136.576,177.241 138.963,179.629 139.624,179.629 140.284,178.968 140.837,178.968 140.99,178.816 140.99,178.212 v1(141.402,177.8)
  Bottom Layer w0.1: MEM2_ADDR.30@97.536,157.607 98.933,159.004 115.824,159.004 116.256,159.436 116.256,165.481 118.669,167.894 v1(129.21,167.894)
DATA1.ADDR15: FPGA.M1 MEM2_ADDR.32 | length 63.4
  Top Layer w0.2: v1(138.506,178.207) FPGA.M1@140.247,178.207
  Mid-Layer 1 w0.2: MEM2_ADDR.32@94.996,157.607 96.075,156.528 131.712,156.528 132.029,156.845 132.029,167.919 138.506,174.396 v1(138.506,178.207)
DATA1.ADDR16: FPGA.L2 MEM2_ADDR.34 | length 70.7
  Top Layer w0.1: v1(140.64,178.613) 140.868,179.007 FPGA.L2@141.047,179.007
  Mid-Layer 1 w0.1: MEM2_ADDR.34@92.456,157.607 93.904,156.159 133.299,156.159 134.01,156.87 134.01,161.595 v1(133.629,161.976)
  Mid-Layer 2 w0.1: v1(133.629,161.976) 133.629,176.251 134.417,177.038 139.167,177.038 140.64,178.511 v1(140.64,178.613)
DATA1.ADDR17: FPGA.L1 MEM2_ADDR.36 | length 71.8
  Top Layer w0.2: v1(139.641,179.007) FPGA.L1@140.247,179.007
  Mid-Layer 1 w0.2: MEM2_ADDR.36@89.916,157.607 91.77,155.753 135.255,155.753 137.998,158.496 137.998,171.958 139.641,173.601 v1(139.641,179.007)
DATA1.ADDR18: FPGA.K2 MEM2_ADDR.38 | length 68
  Top Layer w0.1: v1(140.64,179.4) FPGA.K2@141.047,179.807
  Mid-Layer 1 w0.1: v1(127.533,167.31) 137.592,177.368 137.592,177.927 139.294,179.629 140.411,179.629 v1(140.64,179.4)
  Bottom Layer w0.1: MEM2_ADDR.38@87.376,157.607 88.519,156.464 100.762,156.464 101.168,156.87 101.168,158.318 101.6,158.75 116.002,158.75 116.561,159.309 116.561,164.186 119.685,167.31 v1(127.533,167.31)
DATA1.BUS0: FPGA.K1 MEM2_DATA.2 | length 70.1
  Top Layer w0.2: v1(128.854,209.372) 128.854,190.579 139.626,179.807 FPGA.K1@140.247,179.807
  Mid-Layer 1 w0.2: MEM2_DATA.2@94.361,207.01 96.723,209.372 v1(128.854,209.372)
DATA1.BUS1: FPGA.L4 MEM2_DATA.4 | length 71.9
  Top Layer w0.1: v1(142.164,178.613) 142.253,178.613 FPGA.L4@142.647,179.007
  Mid-Layer 2 w0.1: v1(139.7,203.015) 141.884,200.831 141.884,182.357 141.69,182.163 141.69,179.087 v1(142.164,178.613)
  Bottom Layer w0.1: MEM2_DATA.4@96.901,207.01 98.349,208.458 134.257,208.458 v1(139.7,203.015)
DATA1.BUS2: FPGA.L3 MEM2_DATA.6 | length 69.4
  Top Layer w0.1: v1(141.453,178.613) FPGA.L3@141.847,179.007
  Mid-Layer 1 w0.1: MEM2_DATA.6@99.441,207.01 100.914,208.483 135.306,208.483 v1(137.135,206.654)
  Mid-Layer 2 w0.1: v1(137.135,206.654) 137.135,195.174 140.995,191.313 140.995,179.401 141.453,178.944 v1(141.453,178.613)
DATA1.BUS3: FPGA.J3 MEM2_DATA.8 | length 63.5
  Top Layer w0.1: v1(133.375,206.375) 135.738,206.375 136.144,205.969 136.144,184.723 139.867,181 141.165,181 141.558,180.607 FPGA.J3@141.847,180.607
  Mid-Layer 1 w0.1: MEM2_DATA.8@101.981,207.01 102.895,206.096 133.096,206.096 v1(133.375,206.375)
DATA1.BUS4: FPGA.J1 MEM2_DATA.10 | length 59.8
  Top Layer w0.2: v1(135.407,205.943) 135.407,184.982 139.782,180.607 FPGA.J1@140.247,180.607
  Mid-Layer 1 w0.2: MEM2_DATA.10@104.521,207.01 105.588,208.077 133.274,208.077 v1(135.407,205.943)
DATA1.BUS5: FPGA.H2 MEM2_DATA.12 | length 57.3
  Top Layer w0.1: v1(140.589,182.601) 140.589,181.865 FPGA.H2@141.047,181.407
  Mid-Layer 2 w0.1: MEM2_DATA.12@107.061,207.01 108.161,205.91 130.284,205.91 130.835,205.359 130.835,186.004 v1(135.433,181.407)
  Bottom Layer w0.1: v1(135.433,181.407) 139.395,181.407 v1(140.589,182.601)
DATA1.BUS6: FPGA.H1 MEM2_DATA.14 | length 54.4
  Top Layer w0.2: v1(138.405,203.733) 138.405,182.816 139.243,181.978 139.676,181.978 FPGA.H1@140.247,181.407
  Bottom Layer w0.2: MEM2_DATA.14@109.601,207.01 110.668,208.077 134.061,208.077 v1(138.405,203.733)
DATA1.BUS7: FPGA.K4 MEM2_DATA.16 | length 57.4
  Top Layer w0.1: v1(142.24,179.4) FPGA.K4@142.647,179.807
  Mid-Layer 2 w0.1: MEM2_DATA.16@112.141,207.01 113.513,208.382 136.298,208.382 142.02,202.66 142.02,201.925 142.24,201.705 142.24,199.466 142.697,199.009 142.697,182.817 141.89,182.01 141.89,179.75 v1(142.24,179.4)
DATA1.BUS8: FPGA.K3 MEM2_DATA.18 | length 51.9
  Top Layer w0.1: v1(133.731,203.86) 133.731,186.056 139.565,180.222 141.113,180.222 141.528,179.807 FPGA.K3@141.847,179.807
  Mid-Layer 2 w0.1: MEM2_DATA.18@114.681,207.01 115.781,208.11 133.114,208.11 133.731,207.493 v1(133.731,203.86)
DATA1.BUS9: FPGA.L5 MEM2_DATA.20 | length 47.8
  Top Layer w0.1: MEM2_DATA.20@117.221,207.01 118.847,205.384 118.847,199.568 126.924,191.491 126.924,181.254 128.499,179.68 137.744,179.68 v1(138.811,178.613) ; v1(143.053,178.613) FPGA.L5@143.447,179.007
  Bottom Layer w0.1: v1(138.811,178.613) 139.167,178.257 142.443,178.257 142.799,178.613 v1(143.053,178.613)
DATA1.BUS10: FPGA.K5 MEM2_DATA.22 | length 45.7
  Top Layer w0.1: MEM2_DATA.22@119.761,207.01 120.675,207.924 125.984,207.924 126.467,207.442 126.467,203.835 127.889,202.413 127.889,189.636 v1(137.49,180.035) ; v1(143.053,179.4) 143.053,179.413 FPGA.K5@143.447,179.807
  Bottom Layer w0.1: v1(137.49,180.035) 142.418,180.035 v1(143.053,179.4)
DATA1.BUS11: FPGA.H4 MEM2_DATA.24 | length 39.6
  Top Layer w0.1: v1(142.265,181.789) FPGA.H4@142.647,181.407
  Mid-Layer 2 w0.1: MEM2_DATA.24@122.301,207.01 123.393,207.01 124.293,207.91 125.49,207.91 125.73,207.67 125.73,207.162 126.782,206.11 130.948,206.11 131.42,205.638 131.42,192.786 v1(139.675,184.531)
  Bottom Layer w0.1: v1(139.675,184.531) 142.265,181.94 v1(142.265,181.789)
DATA1.BUS12: FPGA.H3 MEM2_DATA.26 | length 40.2
  Top Layer w0.1: MEM2_DATA.26@124.841,207.01 126.111,205.74 126.111,193.421 127.203,192.329 127.203,186.284 v1(127.787,185.699) ; v1(139.319,185.699) 139.319,184.302 139.484,184.137 140.438,184.137 140.577,183.998 140.577,183.537 140.777,183.337 141.225,183.337 141.453,183.109 141.453,181.801 FPGA.H3@141.847,181.407
  Mid-Layer 1 w0.1: v1(127.787,185.699) v1(139.319,185.699)
DATA1.BUS13: FPGA.L7 MEM2_DATA.28 | length 38.5
  Top Layer w0.1: MEM2_DATA.28@127.381,207.01 128.295,206.096 128.295,190.398 v1(138.227,180.467) ; v1(144.653,179.401) FPGA.L7@145.047,179.007
  Bottom Layer w0.1: v1(138.227,180.467) 143.587,180.467 v1(144.653,179.401)
DATA1.BUS14: FPGA.K6 MEM2_DATA.30 | length 43.2
  Top Layer w0.1: v1(143.84,179.4) FPGA.K6@144.247,179.807
  Mid-Layer 2 w0.1: MEM2_DATA.30@129.921,207.01 130.861,207.01 131.902,205.969 132.893,205.969 133.375,205.486 133.375,193.599 140.208,186.766 140.208,181.635 v1(137.084,178.511)
  Bottom Layer w0.1: v1(137.084,178.511) 137.973,179.4 139.903,179.4 140.259,179.045 143.485,179.045 v1(143.84,179.4)
DATA1.BUS15: FPGA.G3 MEM2_DATA.32 | length 32
  Top Layer w0.1: MEM2_DATA.32@132.461,207.01 136.144,207.01 136.627,206.527 v1(136.627,194.259) ; v1(140.614,184.937) 142.05,184.937 142.177,184.81 142.177,182.423 142.063,182.423 FPGA.G3@141.847,182.207
  Mid-Layer 2 w0.1: v1(136.627,194.259) 140.538,190.348 140.538,185.014 v1(140.614,184.937)
DATA1.ENABLE: FPGA.F2 MEM2_CTRL.8 | length 26.2
  Top Layer w0.1: v1(139.751,183.236) 139.852,183.337 140.488,183.337 140.818,183.007 FPGA.F2@141.047,183.007
  Mid-Layer 1 w0.1: MEM2_CTRL.8@120.269,174.625 122.682,177.038 134.671,177.038 136.5,178.867 137.67,178.867 140.217,181.414 140.217,182.769 v1(139.751,183.236)
DATA1.LB: FPGA.J7 MEM2_CTRL.4 | length 39.3
  Top Layer w0.1: v1(144.653,181.026) 144.653,181.001 FPGA.J7@145.047,180.607
  Mid-Layer 1 w0.1: MEM2_CTRL.4@120.269,179.705 119.355,180.619 119.355,183.109 119.888,183.642 141.961,183.642 142.672,184.353 142.672,186.944 143.205,187.477 v1(143.866,187.477)
  Bottom Layer w0.1: v1(143.866,187.477) 143.485,187.096 143.485,182.194 v1(144.653,181.026)
DATA1.UB: FPGA.G1 MEM2_CTRL.2 | length 20.2
  Top Layer w0.2: v1(139.853,182.448) 140.006,182.448 FPGA.G1@140.247,182.207
  Mid-Layer 1 w0.2: MEM2_CTRL.2@120.269,182.245 139.65,182.245 v1(139.853,182.448)
DATA1.WRITE: FPGA.J6 MEM2_CTRL.6 | length 26.1
  Top Layer w0.1: v1(143.84,181) 143.854,181 FPGA.J6@144.247,180.607
  Mid-Layer 1 w0.1: MEM2_CTRL.6@120.269,177.165 122.159,179.055 v1(136.011,179.055)
  Bottom Layer w0.1: v1(136.011,179.055) 138.093,181.137 139.7,181.137 139.97,181.407 143.434,181.407 v1(143.84,181)
DATA2: EBI_DATA.28 MCU.C3 | length 72.1
  Top Layer w0.1: EBI_DATA.28@80.137,143.256 91.872,131.521 v1(91.872,123.85) ; v1(138.633,124.562) 138.836,124.358 139.029,124.358 MCU.C3@139.029,124.154
  Mid-Layer 1 w0.1: v1(91.872,123.85) 92.202,124.181 138.379,124.181 138.633,124.435 v1(138.633,124.562)
DATA3: EBI_DATA.26 MCU.B3 | length 77.4
  Top Layer w0.1: v1(138.633,125.349) MCU.B3@139.029,124.954
  Mid-Layer 2 w0.1: v1(122.022,146.787) 133.299,146.787 133.756,146.329 133.756,145.923 134.874,144.805 134.874,144.018 134.468,143.612 134.468,133.299 134.899,132.867 134.899,127.686 137.236,125.349 v1(138.633,125.349)
  Bottom Layer w0.1: EBI_DATA.26@82.677,143.256 83.591,144.17 119.405,144.17 v1(122.022,146.787)
DATA4: EBI_DATA.24 MCU.A3 | length 61.1
  Top Layer w0.2: v1(138.028,126.755) MCU.A3@139.029,125.754
  Mid-Layer 1 w0.2: EBI_DATA.24@85.217,143.256 99.39,129.083 134.316,129.083 136.644,126.755 v1(138.028,126.755)
DATA5: EBI_DATA.22 MCU.B2
DATA6: EBI_DATA.20 MCU.A2 | length 56.1
  Top Layer w0.2: v1(137.414,128.168) 137.414,126.569 MCU.A2@138.229,125.754
  Mid-Layer 1 w0.2: EBI_DATA.20@90.297,143.256 94.793,138.76 126.39,138.76 136.982,128.168 v1(137.414,128.168)
DATA7: EBI_DATA.18 MCU.A1 | length 65.7
  Top Layer w0.2: v1(137.033,126.213) 137.033,126.15 MCU.A1@137.429,125.754
  Mid-Layer 1 w0.2: EBI_DATA.18@92.837,143.256 91.787,144.306 89.391,144.306 89.154,144.069 89.154,140.411 98.806,130.759 133.452,130.759 136.86,127.351 138.177,127.351 138.528,127 138.528,126.28 138.503,126.255 137.075,126.255 v1(137.033,126.213)
DATA8: EBI_DATA.16 MCU.B1 | length 62.6
  Top Layer w0.2: MCU.B1@137.429,124.954 136.525,125.858 136.525,129.235 138.648,131.358 v1(138.648,139.762)
  Mid-Layer 1 w0.2: EBI_DATA.16@95.377,143.256 96.444,144.323 133.833,144.323 134.302,143.853 134.302,142.329 134.62,142.011 136.398,142.011 v1(138.648,139.762)
DATA9: EBI_DATA.14 MCU.C2 | length 51.8
  Top Layer w0.1: v1(137.82,124.562) MCU.C2@138.229,124.154
  Mid-Layer 1 w0.1: EBI_DATA.14@97.917,143.256 100.762,140.411 127.991,140.411 v1(131.572,136.83)
  Mid-Layer 2 w0.1: v1(131.572,136.83) 131.572,130.73 137.741,124.562 v1(137.82,124.562)
DATA10: EBI_DATA.12 MCU.C1 | length 44.9
  Top Layer w0.2: EBI_DATA.12@100.457,143.256 v1(115.265,128.448) ; v1(136.627,124.956) MCU.C1@137.429,124.154
  Mid-Layer 1 w0.2: v1(115.265,128.448) 133.135,128.448 v1(136.627,124.956)
DATA11: EBI_DATA.10 MCU.D2 | length 43.5
  Top Layer w0.1: v1(137.86,123.723) MCU.D2@138.229,123.354
  Mid-Layer 1 w0.1: v1(122.53,123.723) v1(137.86,123.723)
  Mid-Layer 2 w0.1: EBI_DATA.10@102.997,143.256 v1(122.53,123.723)
DATA12: EBI_DATA.8 MCU.D1 | length 45.9
  Top Layer w0.2: v1(136.497,133.604) 136.497,130.019 136.119,129.641 136.119,124.664 MCU.D1@137.429,123.354
  Mid-Layer 1 w0.2: EBI_DATA.8@105.537,143.256 107.95,140.843 129.258,140.843 v1(136.497,133.604)
DATA13: EBI_DATA.6 MCU.E3
DATA14: EBI_DATA.4 MCU.E2
DATA15: EBI_DATA.2 MCU.E1 | length 43.8
  Top Layer w0.2: v1(136.271,141.427) 135.965,141.122 135.965,130.288 135.636,129.959 135.636,124.347 MCU.E1@137.429,122.554
  Mid-Layer 1 w0.2: EBI_DATA.2@113.157,143.256 114.986,141.427 v1(136.271,141.427)
E/D: FPGA_CLK.1
EBI.HSNC: MCU.K5
EBI.REN: EBI_address.2 MCU.C6 | length 78.1
  Top Layer w0.1: MCU.C6@141.429,124.154 141.834,124.559 141.834,126.748 141.771,126.81 141.771,127.339 141.935,127.503 142.422,127.503 v1(142.621,127.305)
  Mid-Layer 2 w0.1: v1(142.621,127.305) v1(142.621,141.656)
  Bottom Layer w0.1: v1(142.621,141.656) 199.949,141.656 EBI_address.2@201.422,143.129
EBI.WE: EBI_address.4 MCU.B6 | length 75.5
  Top Layer w0.1: v1(141.173,134.798) 141.046,134.671 141.046,125.337 MCU.B6@141.429,124.954
  Mid-Layer 1 w0.1: v1(141.173,134.798) 142.265,135.89 153.213,135.89 159.388,142.065 159.388,143.31 160.122,144.043 161.341,144.043 162.154,143.231 162.154,142.467 162.56,142.06 184.173,142.06 184.76,142.646 184.76,143.485 185.547,144.272 197.739,144.272 EBI_address.4@198.882,143.129
FPGA.A00: EBI_address.59 FPGA.P8 | length 45.2
  Top Layer w0.1: FPGA.P8@145.847,176.607 146.304,176.15 146.304,174.883 146.638,174.549 146.914,174.549 147.117,174.346 147.117,171.907 148.641,170.383 v1(148.641,159.207)
  Mid-Layer 1 w0.1: EBI_address.59@127.762,145.669 129.464,147.371 136.804,147.371 v1(148.641,159.207)
FPGA.A01: EBI_address.57 FPGA.N7 | length 39
  Top Layer w0.1: EBI_address.57@130.302,145.669 132.196,147.563 132.196,158.09 132.642,158.536 133.907,158.536 142.113,166.742 v1(142.113,172.364) ; v1(144.653,177.013) 144.856,177.216 145.047,177.216 FPGA.N7@145.047,177.407
  Mid-Layer 1 w0.1: v1(142.113,172.364) 141.935,172.542 141.935,173.126 142.151,173.342 142.356,173.342 144.221,175.207 144.221,176.581 v1(144.653,177.013)
FPGA.A02: EBI_address.55 FPGA.V7 | length 32.8
  Top Layer w0.2: EBI_address.55@132.842,145.669 134.163,146.99 134.163,157.48 145.047,168.364 FPGA.V7@145.047,173.407
FPGA.A03: EBI_address.53 FPGA.U7 | length 36.6
  Top Layer w0.1: v1(144.653,173.813) FPGA.U7@145.047,174.207
  Mid-Layer 1 w0.1: EBI_address.53@135.382,145.669 136.271,146.482 147.879,158.09 148.59,158.09 148.996,158.496 148.996,168.117 144.653,172.46 v1(144.653,173.813)
FPGA.A04: EBI_address.51 FPGA.V8 | length 31
  Top Layer w0.2: EBI_address.51@137.922,145.669 137.922,159.171 145.847,167.096 FPGA.V8@145.847,173.407
FPGA.A05: EBI_address.49 FPGA.U8 | length 37
  Top Layer w0.1: EBI_address.49@140.462,145.669 139.548,144.755 137.363,144.755 136.652,145.466 136.652,158.254 145.44,167.043 145.44,173.8 FPGA.U8@145.847,174.207
FPGA.A06: EBI_address.47 FPGA.N8 | length 35.2
  Top Layer w0.1: v1(145.446,177.007) FPGA.N8@145.847,177.407
  Mid-Layer 2 w0.1: EBI_address.47@143.002,145.669 143.002,164.617 148.207,169.823 148.207,170.182 145.84,172.549 145.84,176.613 v1(145.446,177.007)
FPGA.A07: EBI_address.45 FPGA.M8 | length 35.1
  Top Layer w0.1: v1(145.44,177.8) FPGA.M8@145.847,178.207
  Mid-Layer 2 w0.1: v1(145.44,177.8) 146.04,177.201 146.04,172.754 148.407,170.386 148.407,169.718 145.542,166.853 EBI_address.45@145.542,145.669
FPGA.A08: EBI_address.43 FPGA.V9 | length 28.6
  Top Layer w0.2: FPGA.V9@146.647,173.407 146.355,173.115 146.355,147.396 EBI_address.43@148.082,145.669
FPGA.A09: EBI_address.41 FPGA.T9 | length 32.2
  Top Layer w0.1: FPGA.T9@146.647,175.007 147.041,175.401 v1(147.041,175.412)
  Mid-Layer 2 w0.1: v1(147.041,175.412) 147.041,173.787 147.572,173.256 148.331,173.256 148.883,172.704 148.883,171.105 149.007,170.98 149.007,161.736 150.622,160.122 EBI_address.41@150.622,145.669
FPGA.A10: EBI_address.39 FPGA.T8 | length 36.9
  Top Layer w0.1: FPGA.T8@145.847,175.007 145.847,174.676 146.253,174.269 146.253,174.015 146.507,173.761 146.914,173.761 147.117,173.558 147.117,172.39 147.58,171.927 147.58,171.755 149.504,169.83 149.504,166.218 149.733,165.989 154.203,165.989 155.194,164.998 155.194,147.701 EBI_address.39@153.162,145.669
FPGA.A11: EBI_address.37 FPGA.R8 | length 45.7
  Top Layer w0.1: v1(145.364,175.412) 145.452,175.412 FPGA.R8@145.847,175.807
  Mid-Layer 1 w0.1: v1(145.364,175.412) 145.796,174.981 155.328,174.981 155.432,175.084 156.386,175.084 157.836,173.634 v1(158.623,173.634)
  Mid-Layer 2 w0.1: EBI_address.37@155.702,145.669 159.969,149.936 159.969,173.533 159.868,173.634 v1(158.623,173.634)
FPGA.A12: EBI_address.35 FPGA.V10 | length 34.2
  Top Layer w0.2: FPGA.V10@147.447,173.407 152.347,168.507 155.698,168.507 158.242,165.964 EBI_address.35@158.242,145.669
FPGA.A13: EBI_address.33 FPGA.U10 | length 47.8
  Top Layer w0.1: FPGA.U10@147.447,174.207 147.842,173.812 v1(147.853,173.812) ; v1(155.194,167.157) 155.448,166.903 155.448,147.015 154.788,146.355 154.788,145.212 155.245,144.755 159.868,144.755 EBI_address.33@160.782,145.669
  Mid-Layer 1 w0.1: v1(147.853,173.812) 147.38,173.338 147.38,171.289 152.4,166.268 152.4,163.754 152.603,163.551 154.356,163.551 154.483,163.678 154.483,166.446 v1(155.194,167.157)
FPGA.A14: EBI_address.31 FPGA.T10 | length 43.3
  Top Layer w0.1: FPGA.T10@147.447,175.007 v1(147.853,174.6)
  Mid-Layer 2 w0.1: v1(147.853,174.6) 148.285,174.168 148.879,174.168 149.283,173.764 149.283,171.614 149.407,171.49 149.407,161.965 151.105,160.268 151.105,149.2 154.402,145.902 154.402,144.475 154.508,144.369 162.022,144.369 EBI_address.31@163.322,145.669
FPGA.A15: EBI_address.29 FPGA.R10 | length 49.5
  Top Layer w0.1: v1(147.091,175.489) 147.447,175.489 FPGA.R10@147.447,175.807
  Mid-Layer 2 w0.1: v1(147.091,175.489) 147.472,175.108 148.133,175.108 148.361,175.336 148.361,175.565 148.565,175.768 148.877,175.768 149.487,175.158 149.487,171.755 150.393,170.848 150.393,161.62 151.714,160.299 151.714,155.829 152.832,154.711 152.832,149.022 154.602,147.252 154.602,145.085 155.118,144.569 159.352,144.569 159.868,145.085 159.868,146.329 160.122,146.583 164.948,146.583 EBI_address.29@165.862,145.669
FPGA.A16: EBI_address.27 FPGA.V11 | length 44.8
  Top Layer w0.2: FPGA.V11@148.247,173.407 151.144,170.51 158.445,170.51 159.004,169.951 159.004,147.549 159.385,147.168 166.903,147.168 EBI_address.27@168.402,145.669
FPGA.A17: EBI_address.25 FPGA.U11 | length 48.4
  Top Layer w0.1: FPGA.U11@148.247,174.207 v1(148.641,173.812)
  Mid-Layer 1 w0.1: v1(152.121,146.583) 170.028,146.583 EBI_address.25@170.942,145.669
  Mid-Layer 2 w0.1: v1(148.641,173.812) 149.083,173.37 149.083,171.214 149.207,171.09 149.207,161.841 150.876,160.172 150.876,147.828 v1(152.121,146.583)
FPGA.A18: EBI_address.23 FPGA.N9 | length 56.5
  Top Layer w0.1: FPGA.N9@146.647,177.407 v1(147.041,177.013)
  Mid-Layer 2 w0.1: v1(147.041,177.013) 146.691,176.662 146.691,173.852 147.608,172.934 148.298,172.934 148.48,172.753 148.48,170.992 148.807,170.664 148.807,166.464 148.209,165.866 v1(148.209,149.733)
  Bottom Layer w0.1: v1(148.209,149.733) 150.241,147.701 171.45,147.701 EBI_address.23@173.482,145.669
FPGA.A19: EBI_address.21 FPGA.M10
FPGA.A20: EBI_address.19 FPGA.P11 | length 60.7
  Top Layer w0.1: FPGA.P11@148.247,176.607 v1(148.584,176.27) ; v1(172.161,178.638) 172.161,171.044 178.562,164.643 EBI_address.19@178.562,145.669
  Mid-Layer 1 w0.1: v1(148.584,176.27) 154.655,176.27 157.023,178.638 v1(172.161,178.638)
FPGA.A21: EBI_address.17 FPGA.N10 | length 69.1
  Top Layer w0.1: FPGA.N10@147.447,177.407 147.447,177.216 147.523,177.216 v1(147.726,177.013)
  Mid-Layer 2 w0.1: v1(147.726,177.013) 147.371,177.368 146.812,177.368 146.491,177.047 146.491,173.769 147.748,172.511 148.133,172.511 148.28,172.364 148.28,170.897 148.607,170.569 148.607,166.616 146.888,164.897 146.888,149.149 v1(149.022,147.015)
  Bottom Layer w0.1: v1(149.022,147.015) 171.123,147.015 171.91,146.228 171.91,145.014 172.355,144.569 180.002,144.569 EBI_address.17@181.102,145.669
FPGA.A22: EBI_address.15 FPGA.V12 | length 59.3
  Top Layer w0.2: FPGA.V12@149.047,173.407 151.544,170.91 159.47,170.91 159.664,170.716 v1(159.664,148.184)
  Mid-Layer 1 w0.2: v1(159.664,148.184) 181.127,148.184 EBI_address.15@183.642,145.669